# Altium PCB PCB_Nameless_3_2023-11-12.pcbdoc
Units mil, origin at the board's own origin, x right, y up, seen from the top; angles counter-clockwise.
Board outline 6527.04 x 4591.93 mil, 2 copper layers (Top Layer, Bottom Layer); 103 components, 96 nets, 388 pads, 63 vias.
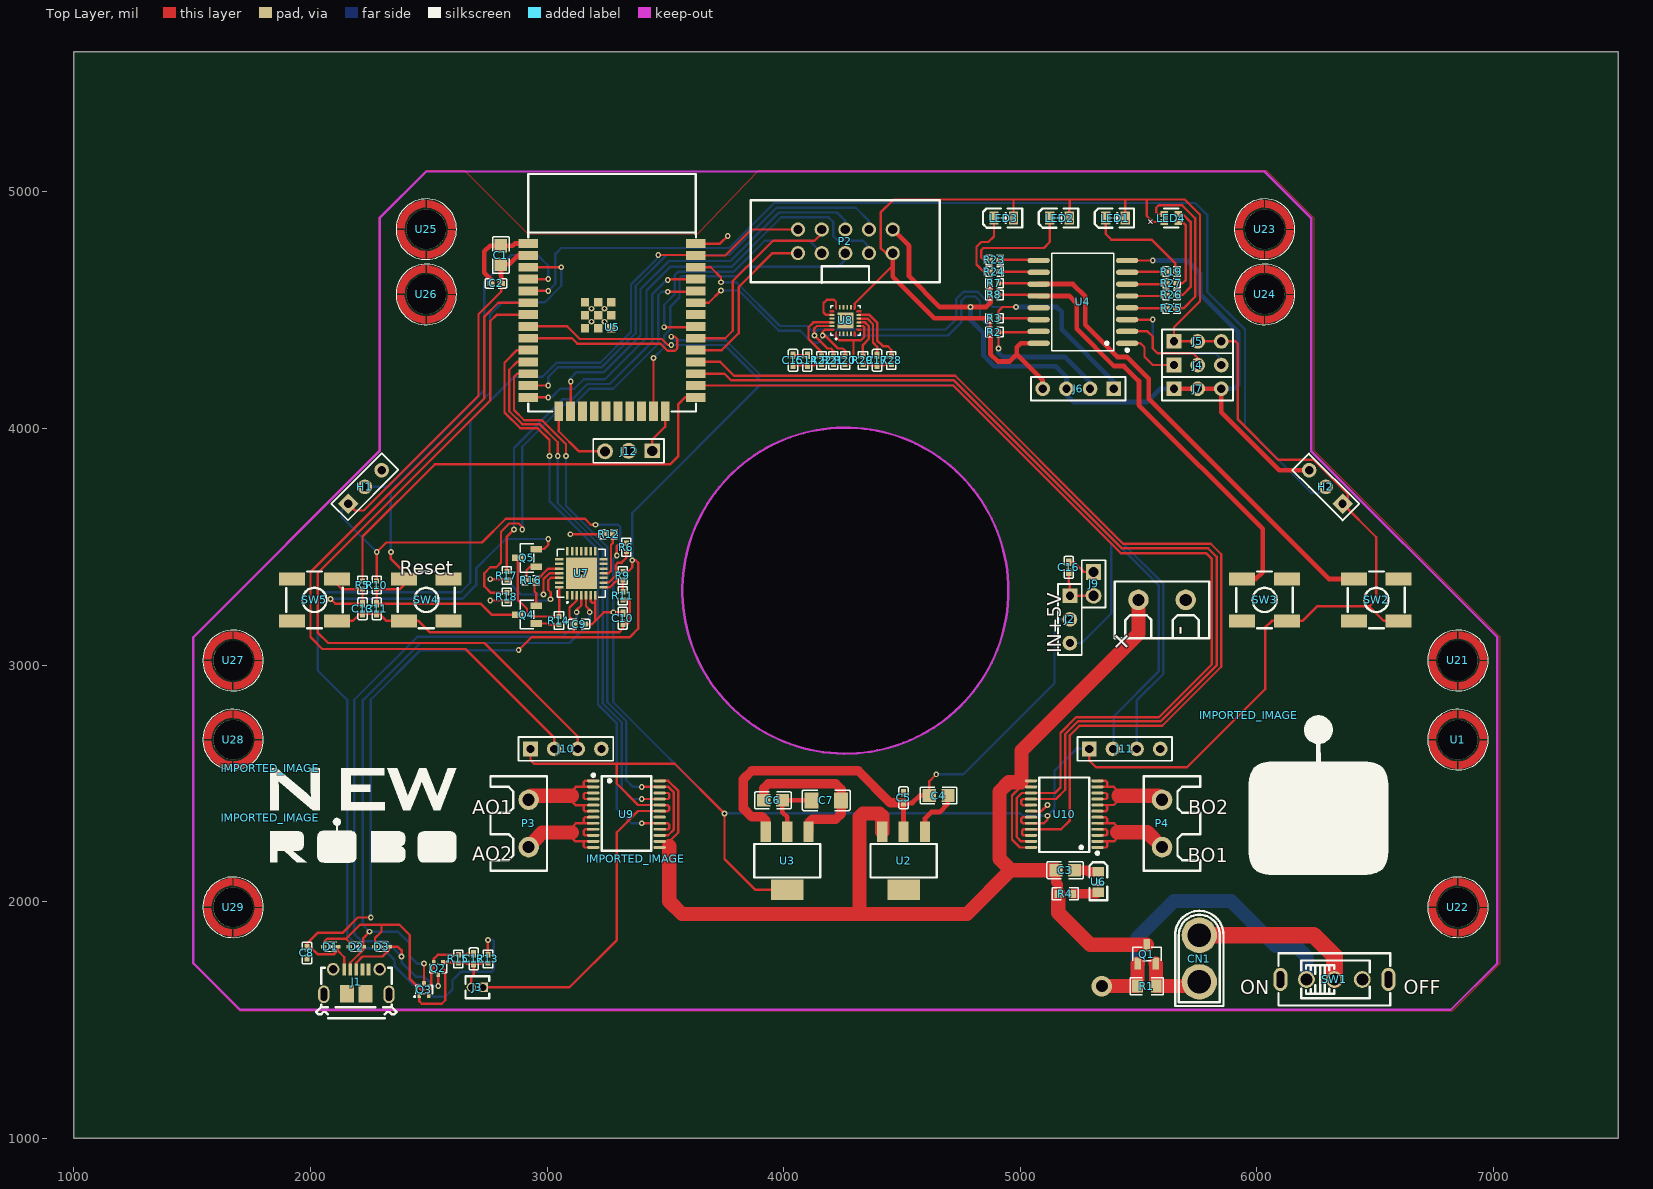
[diagram p0: Top Layer view]
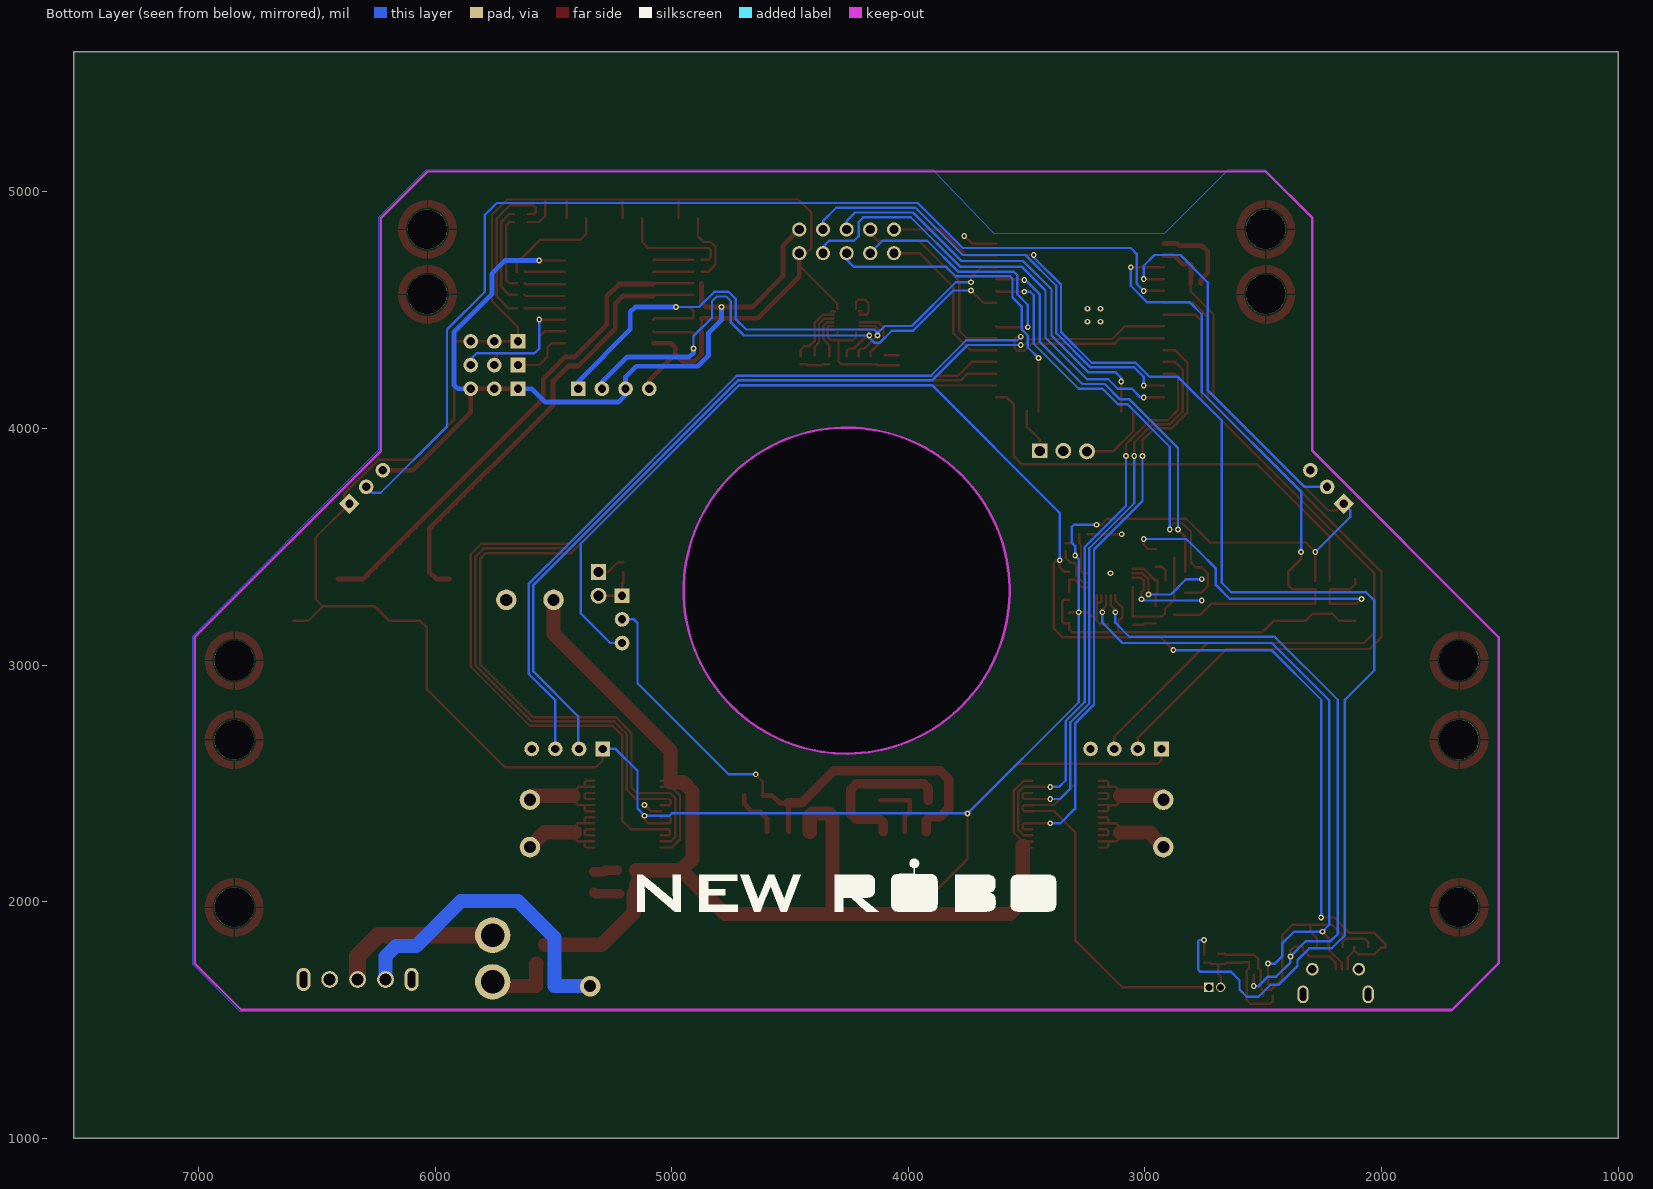
[diagram p1: Bottom Layer view, seen from below]

## Layer stack, top to bottom
Top Layer: signal copper (thickness not stored)
Dielectric: dielectric 12.6, FR-4, Dk 4.8
Bottom Layer: signal copper (thickness not stored)

## Board outline
7527.04,1000 1000,1000 1000,5591.93 7527.04,5591.93

## Components (designator, comment, footprint, x,y, rotation, side; value= is the part's Value field where it differs from the comment)
C1 "22uF" C0805 2805,4733.31 r90 top
C2 "100nF" C0402 2784.53,4613.31 r180 top
C3 "10uF" C0805 5189.99,2133.31 r0 top
C4 "22uF" C0805 4654.6,2448.82 r0 top
C5 "10uF" C0402 4506.96,2438.98 r90 top
C6 "22uF" C0805 3954.99,2428.31 r180 top
C7 "100uF" C1206 4179.99,2428.31 r0 top
C8 "100nF" C0402 1985,1783.31 r270 top
C9 "4.7uF" C0402 3135,3173.31 r0 top
C10 "100nF" C0402 3320,3198.31 r270 top
C11 "100nF" C0402 2280,3238.31 r270 top
C12 "100nF" C0402 2690,1758.31 r90 top
C13 "100nF" C0402 2220,3238.31 r270 top
C14 "100nF" C0402 4099.99,4288.31 r90 top
C15 "10nF" C0402 4039.99,4288.31 r90 top
C16 "100nF" C0402 5204.99,3413.31 r270 top
C17 "100nF" C0402 4394.99,4288.31 r270 top
CN1 "XT30U-M" CONN-TH_XT30U-M 5756.96,1759.85 r90 top
D1 "LESD5D5.0CT1G" SOD-523_L1.2-W0.8-LS1.6-BI 2085.71,1809.06 r180 top
D2 "LESD5D5.0CT1G" SOD-523_L1.2-W0.8-LS1.6-BI 2193.97,1809.06 r180 top
D3 "LESD5D5.0CT1G" SOD-523_L1.2-W0.8-LS1.6-BI 2302.24,1809.06 r180 top
H1 "HDR-F-2.54_1x3" HDR-F-2.54_1X3 2230,3753.31 r45 top
H2 "HDR-F-2.54_1x3" HDR-F-2.54_1X3 6291.8,3753.31 r135 top
IMPORTED_IMAGE "IMPORTED_IMAGE" IMPORTED_IMAGE 3375.08,2181.95 r0 top
IMPORTED_IMAGE "IMPORTED_IMAGE" IMPORTED_IMAGE 5964.99,2787.14 r0 top
IMPORTED_IMAGE "IMPORTED_IMAGE" IMPORTED_IMAGE 1829.02,2564.13 r0 top
IMPORTED_IMAGE "IMPORTED_IMAGE" IMPORTED_IMAGE 1829.02,2354.26 r0 top
J1 "105017-0001" MICRO-USB-SMD_105017-0001 2193.97,1661.42 r0 top
J2 "HDR-M-2.54_1x3" HDR-M-2.54_1X3 5209.99,3193.31 r270 top
J3 "DZ127R-11-02-25" HDR-TH_2P-P1.27-V-M 2705,1638.31 r180 top
J4 "HDR-M-2.54_1x3" HDR-M-2.54_1X3 5749.99,4268.31 r0 top
J5 "HDR-M-2.54_1x3" HDR-M-2.54_1X3 5749.99,4368.31 r0 top
J6 "HDR-M-2.54_1x4" HDR-M-2.54_1X4 5245.15,4168.31 r180 top
J7 "HDR-M-2.54_1x3" HDR-M-2.54_1X3 5749.99,4168.31 r0 top
J9 "HDR-M-2.54_1x2" HDR-M-2.54_1X2 5309.99,3343.31 r270 top
J10 "HDR-M-2.54_1x4" HDR-M-2.54_1X4 3079.8,2645.67 r0 top
J11 "HDR-M-2.54_1x4" HDR-M-2.54_1X4 5442,2645.67 r0 top
J12 "_" ?#1 3344.9,3953.21 r0 top
LED1 "SZYY0805B" LED0805-R-RD_BLUE 5402.63,4889.76 r0 top
LED2 "SZYY0805B" LED0805-R-RD_BLUE 5166.41,4889.76 r0 top
LED3 "SZYY0805B" LED0805-R-RD_BLUE 4930.19,4889.76 r0 top
LED4 "XL-1615RGBC-RF" LED-ARRAY-SMD_4P-L1.6-W1.5-BR_XL-1615RGBC-RF 5638.85,4889.76 r180 top
P2 "HDR-IDC-2.54-2X5P" IDC-TH_10P-P2.54_C5665 4260.9,4791.34 r0 top
P3 "" ?#2 2806.95,2378.41 r0 top
P4 "" ?#3 5719.44,2378.41 r0 top
Q1 "Si2323DDS-T1-GE3" SOT-23-3_L2.9-W1.3-P1.90-LS2.4-BR 5534.99,1778.31 r270 top
Q2 "2N7002T-7-F" SOT-523-3_L1.6-W0.8-P1.00-LS1.6-BR 2540.27,1717.77 r90 top
Q3 "2N7002T-7-F" SOT-523-3_L1.6-W0.8-P1.00-LS1.6-BR 2480,1628.31 r270 top
Q4 "SS8050-G_C164885" SOT-23-3_L2.9-W1.3-P1.90-LS2.4-BR 2915,3213.31 r0 top
Q5 "SS8050-G_C164885" SOT-23-3_L2.9-W1.3-P1.90-LS2.4-BR 2915,3453.31 r0 top
R1 "10kΩ" R0805 5534.99,1643.31 r0 top
R2 "1kΩ" R0402 4890.82,4407.48 r0 top
R3 "1kΩ" R0402 4890.82,4466.53 r0 top
R4 "2.2kΩ" R0603 5189.99,2033.31 r0 top
R5 "22Ω" R0402 2220,3338.31 r270 top
R6 "1kΩ" R0402 3335,3498.31 r270 top
R7 "10kΩ" R0402 4890.82,4614.17 r180 top
R8 "10kΩ" R0402 4890.82,4564.96 r180 top
R9 "22.1kΩ" R0402 3320,3378.31 r270 top
R10 "10kΩ" R0402 2280,3338.31 r270 top
R11 "47.5kΩ" R0402 3320,3293.31 r270 top
R12 "10kΩ" R0402 3260,3553.31 r180 top
R13 "1kΩ" R0402 2750,1758.31 r270 top
R14 "10kΩ" R0402 3050,3188.31 r270 top
R15 "10kΩ" R0402 2625,1758.31 r90 top
R16 "10kΩ" R0402 2930,3358.31 r180 top
R17 "0Ω" R0402 2830,3378.31 r270 top
R18 "0Ω" R0402 2830,3288.31 r270 top
R19 "1kΩ" R0402 5638.85,4663.38 r180 top
R20 "10kΩ" R0402 4259.99,4288.31 r90 top
R21 "10kΩ" R0402 4209.99,4288.31 r90 top
R22 "10kΩ" R0402 4159.99,4288.31 r90 top
R23 "1kΩ" R0402 4890.82,4712.6 r0 top
R24 "1kΩ" R0402 4890.82,4663.38 r0 top
R25 "1kΩ" R0402 5638.85,4507.87 r0 top
R26 "1kΩ" R0402 5638.85,4564.96 r180 top
R27 "1kΩ" R0402 5638.85,4614.17 r180 top
R28 "10kΩ" R0402 4454.99,4288.31 r270 top
R29 "10kΩ" R0402 4334.99,4288.31 r270 top
SW1 "SS-12F44-G5" SW-TH_SS-12F44-G5 6327.82,1671.26 r0 top
SW2 "PTS645SM43JSMTR92 LFS" KEY-SMD_4P-L6.0-W6.0-P4.50-LS6.6 6504.99,3275.59 r180 top
SW3 "PTS645SM43JSMTR92 LFS" KEY-SMD_4P-L6.0-W6.0-P4.50-LS6.6 6032.55,3275.59 r180 top
SW4 "PTS645SM43JSMTR92 LFS" KEY-SMD_4P-L6.0-W6.0-P4.50-LS6.6 2489.25,3275.59 r180 top
SW5 "PTS645SM43JSMTR92 LFS" KEY-SMD_4P-L6.0-W6.0-P4.50-LS6.6 2016.81,3275.59 r180 top
U1 "SMD_BD5.6-L5.6-W5.6-D4.1" SMD_BD5.6-L5.6-W5.6-D4.1 6849.48,2685.04 r0 top
U2 "AMS1117-5.0_C347223" SOT-223_L6.7-W3.5-P2.30-BR 4506.96,2173.23 r90 top
U3 "AMS1117-3.3_C347222" SOT-223_L6.7-W3.5-P2.30-BR 4014.84,2173.23 r90 top
U4 "PCF8574T/3,518" SOIC-16_L10.3-W7.5-P1.27-LS10.3-BL 5264.84,4535.43 r90 top
U5 "ESP32-WROOM-32E(4MB)" WIFI-SMD_ESP32-WROOM-32E 3274.68,4427.16 r270 top
U6 "LSR976-NR-1" LED0805-RD_RED 5329.99,2083.31 r270 top
U7 "CP2102N-A02-GQFN28R" QFN-28_L5.0-W5.0-P0.50-TL-EP3.3 3145,3388.31 r90 top
U8 "MPU-9250" QFN-24_L3.0-W3.0-P0.40-BL-EP 4260.9,4456.69 r0 top
U9 "TB6612FNG,C,8,EL" SSOP-24_L8.3-W5.6-P0.65-LS7.6-BL 3335.7,2370.08 r270 top
U10 "TB6612FNG,C,8,EL" SSOP-24_L8.3-W5.6-P0.65-LS7.6-BL 5186.1,2370.08 r90 top
U21 "SMD_BD5.6-L5.6-W5.6-D4.1" SMD_BD5.6-L5.6-W5.6-D4.1 6849.48,3019.69 r0 top
U22 "SMD_BD5.6-L5.6-W5.6-D4.1" SMD_BD5.6-L5.6-W5.6-D4.1 6849.48,1976.38 r0 top
U23 "SMD_BD5.6-L5.6-W5.6-D4.1" SMD_BD5.6-L5.6-W5.6-D4.1 6032.55,4842.52 r0 top
U24 "SMD_BD5.6-L5.6-W5.6-D4.1" SMD_BD5.6-L5.6-W5.6-D4.1 6032.55,4566.93 r0 top
U25 "SMD_BD5.6-L5.6-W5.6-D4.1" SMD_BD5.6-L5.6-W5.6-D4.1 2489.25,4842.52 r0 top
U26 "SMD_BD5.6-L5.6-W5.6-D4.1" SMD_BD5.6-L5.6-W5.6-D4.1 2489.25,4566.93 r0 top
U27 "SMD_BD5.6-L5.6-W5.6-D4.1" SMD_BD5.6-L5.6-W5.6-D4.1 1672.32,3019.69 r0 top
U28 "SMD_BD5.6-L5.6-W5.6-D4.1" SMD_BD5.6-L5.6-W5.6-D4.1 1672.32,2685.04 r0 top
U29 "SMD_BD5.6-L5.6-W5.6-D4.1" SMD_BD5.6-L5.6-W5.6-D4.1 1672.32,1976.38 r0 top

## Footprints (in the part's own frame and the unit in brackets; to place one, negate y for a bottom-side part, rotate by r counter-clockwise, add the part's x,y. Pads: shape width x height; smd on the part's side, far side on the other; paste and mask are expansions set on the pad)
C0402 [mm]
  rect 0.79x0.54 smd paste-100 mask+0.051: 1(-0.545,0) 2(0.545,0)
  silkscreen extent -1.17,-0.5 1.17,0.5
C0805 [mm]
  rect 1.41x1.35 smd paste-100 mask+0.051: 1(-1,0) 2(1,0)
  silkscreen extent -1.96,-0.9 1.96,0.9
C1206 [mm]
  rect 1.485x1.728 smd paste-100 mask+0.051: 1(-1.593,0) 2(1.593,0)
  silkscreen extent -2.56,-1.09 2.56,1.09
CONN-TH_XT30U-M [mm]
  round 3.8 hole 2.54 paste+0 mask+0.05: 1(-2.5,0) 2(2.5,0)
  silkscreen extent -5.1,-2.6 5.11,2.6
HDR-F-2.54_1X3 [mil]
  rect 62x62 hole 35 paste+0 mask+2: 1(-100,0)
  round 62 hole 35 paste+0 mask+2: 2(0,0)
  round 62 hole 36 paste+0 mask+2: 3(100,0)
  silkscreen extent -150,-49 150,50
HDR-M-2.54_1X2 [mm]
  rect 1.7x1.575 hole 1.1 paste+0 mask+0.051: 1(-1.27,0)
  round 1.7 hole 1.1 paste+0 mask+0.051: 2(1.27,0)
  silkscreen extent -2.54,-1.27 2.54,1.27
HDR-M-2.54_1X3 [mil]
  rect 62x62 hole 35 paste+0 mask+2: 1(-100,0)
  round 62 hole 35 paste+0 mask+2: 2(0,0) 3(100,0)
  silkscreen extent -150,-50 150,50
HDR-M-2.54_1X4 [mil]
  rect 62x62 hole 35 paste+0 mask+2: 1(-150,0)
  round 62 hole 35 paste+0 mask+2: 2(-50,0) 3(50,0) 4(150,0)
  silkscreen extent -200,-50 200,50
HDR-TH_2P-P1.27-V-M [mm]
  rect 1x1 hole 0.75 paste+0 mask+0.051: 1(-0.635,0)
  round 1 hole 0.75 paste+0 mask+0.051: 2(0.635,0)
  silkscreen extent -1.27,-1.18 1.27,1.18
IDC-TH_10P-P2.54_C5665 [mil]
  round 60 hole 39.37 paste+0 mask+1.97: 1(-200,-50) 2(-200,50) 3(-100,-50) 4(-100,50) 5(0,-50) 6(0,50) 7(100,-50) 8(100,50) 9(200,-50) 10(200,50)
  silkscreen extent -400,-175 400,173
IMPORTED_IMAGE [mil]
KEY-SMD_4P-L6.0-W6.0-P4.50-LS6.6 [mm]
  rect 2.8x1.4 smd paste+0 mask+0.051: 1(-2.4,-2.25) 2(2.4,-2.25) 3(2.4,2.25) 4(-2.4,2.25)
  silkscreen extent -3.05,-3.05 3.05,3.05
LED0805-R-RD_BLUE [mm]
  rect 1x1.4 smd paste+0 mask+0.051: 1(1.05,0) 2(-1.05,0)
  silkscreen extent -2.22,-1.04 1.99,1.01
LED0805-RD_RED [mm]
  rect 1x1.25 smd paste+0 mask+0.051: 1(-1.1,0) 2(1.1,0)
  silkscreen extent -2.1,-0.95 1.98,0.96
LED-ARRAY-SMD_4P-L1.6-W1.5-BR_XL-1615RGBC-RF [mm]
  rect 0.8x0.65 smd paste+0 mask+0.05: 1(0.75,-0.425) 2(0.75,0.425) 3(-0.75,0.425) 4(-0.75,-0.425)
  silkscreen extent -0.76,-1.02 0.76,1.02
MICRO-USB-SMD_105017-0001 [mm]
  rect 0.4x1.3 smd paste-100 mask+0.051: 1(-1.3,1.33) 2(-0.65,1.33) 3(0,1.33) 4(0.65,1.33) 5(1.3,1.33)
  round 1.35 hole 0.9 paste+0 mask+0.051: 6(-2.5,1.35) 7(2.5,1.35)
  oval 1.2x1.9 hole 0.7 slot 1.4 at 90 deg paste+0 mask+0.051: 8(3.5,-1.35) 9(-3.5,-1.35)
  rect 1.5x1.9 smd paste-100 mask+0.051: 10(-1,-1.28) 10(1,-1.28)
  silkscreen extent -4.32,-3.9 4.32,1.5
QFN-24_L3.0-W3.0-P0.40-BL-EP [mm]
  rect 0.2x0.505 smd paste-100 mask+0.051: 2(-0.6,-1.428) 3(-0.2,-1.428) 4(0.2,-1.428) 5(0.6,-1.428) 14(0.6,1.428) 15(0.2,1.428) 16(-0.2,1.428) 17(-0.6,1.428)
  rect 0.505x0.2 smd paste-100 mask+0.051: 8(1.428,-0.6) 9(1.428,-0.2) 10(1.428,0.2) 11(1.428,0.6) 20(-1.428,0.6) 21(-1.428,0.2) 22(-1.428,-0.2) 23(-1.428,-0.6)
  rect 1.7x1.7 smd paste-100 mask+0.051: 25(0,0)
  Top Layer region: -1.1,1.68 -0.9,1.68 -0.9,1.175 -1,1.174 -1.1,1.274
  Top Layer region: -1.68,-1.1 -1.274,-1.1 -1.174,-1 -1.175,-0.9 -1.68,-0.9
  Top Layer region: 1.68,-1.1 1.275,-1.1 1.175,-1 1.175,-0.9 1.68,-0.9
  Top Layer region: 1.68,1.1 1.274,1.1 1.174,1 1.175,0.9 1.68,0.9
  Top Layer region: 1.1,1.68 0.9,1.68 0.9,1.175 1,1.174 1.1,1.274
  Top Layer region: -1.1,-1.68 -0.9,-1.68 -0.9,-1.175 -1,-1.175 -1.1,-1.275
  Top Layer region: 1.1,-1.68 0.9,-1.68 0.9,-1.175 1,-1.175 1.1,-1.275
  Top Layer region: -1.68,1.1 -1.274,1.1 -1.174,1 -1.175,0.9 -1.68,0.9
  silkscreen extent -1.58,-2.05 1.58,1.58
QFN-28_L5.0-W5.0-P0.50-TL-EP3.3 [mm]
  rect 0.905x0.28 smd paste-100 mask+0.051: 1(-2.377,1.5) 2(-2.377,1) 3(-2.377,0.5) 4(-2.377,0) 5(-2.377,-0.5) 6(-2.377,-1) 7(-2.377,-1.5) 15(2.377,-1.5) 16(2.377,-1) 17(2.377,-0.5) 18(2.377,0) 19(2.377,0.5) 20(2.377,1) 21(2.377,1.5)
  rect 0.28x0.905 smd paste-100 mask+0.051: 8(-1.5,-2.377) 9(-1,-2.377) 10(-0.5,-2.377) 11(0,-2.377) 12(0.5,-2.377) 13(1,-2.377) 14(1.5,-2.377) 22(1.5,2.377) 23(1,2.377) 24(0.5,2.377) 25(0,2.377) 26(-0.5,2.377) 27(-1,2.377) 28(-1.5,2.377)
  rect 3.35x3.35 smd paste-100 mask+0.051: 29(0,0)
  silkscreen extent -3.2,-2.58 2.58,2.58
R0402 [mm]
  rect 0.566x0.54 smd paste-100 mask+0.051: 1(-0.433,0) 2(0.433,0)
  silkscreen extent -0.94,-0.5 0.94,0.5
R0603 [mil]
  rect 31.75x34.02 smd paste-3937.01 mask+2: 1(-29.66,0) 2(29.65,0)
  silkscreen extent -55,-26 55,26
R0805 [mil]
  rect 44.59x54.21 smd paste-3937.01 mask+2: 1(-39.37,0) 2(39.37,0)
  silkscreen extent -69,-36 69,36
SMD_BD5.6-L5.6-W5.6-D4.1 [mil]
  round 167.32 hole 167.32 unplated paste+0: ""(0.39,-0.1)
  Top Layer region: 4.06,122.59 9.97,122.2 19.02,121.01 24.93,119.83 37.53,116.29 53.67,109.99 69.02,101.33 82.41,90.31 96.58,76.13 107.21,59.6 111.54,50.94 116.27,39.91 122.17,18.26 123.75,2.91 92.25,2.91 90.28,15.9 85.16,34.8 79.65,43.46 70.99,56.84 58.39,70.23 41.86,80.46 31.62,85.19 15.87,89.91 4.06,91.09
  Top Layer region: 123.49,-4.25 123.09,-10.16 121.91,-19.21 120.73,-25.12 117.19,-37.72 110.89,-53.86 102.23,-69.21 91.2,-82.6 77.03,-96.77 60.49,-107.4 51.83,-111.73 40.81,-116.46 19.16,-122.36 3.8,-123.94 3.8,-92.44 16.79,-90.47 35.69,-85.36 44.35,-79.84 57.74,-71.18 71.12,-58.58 81.36,-42.05 86.09,-31.81 90.81,-16.07 91.99,-4.25
  Top Layer region: -4.06,-123.59 -9.96,-123.2 -19.02,-122.02 -24.93,-120.84 -37.52,-117.29 -53.66,-110.99 -69.02,-102.33 -82.4,-91.31 -96.58,-77.13 -107.21,-60.6 -111.54,-51.94 -116.26,-40.91 -122.17,-19.26 -123.74,-3.91 -92.25,-3.91 -90.28,-16.9 -85.16,-35.8 -79.65,-44.46 -70.99,-57.84 -58.39,-71.23 -41.85,-81.46 -31.62,-86.19 -15.87,-90.91 -4.06,-92.09
  Top Layer region: -123.2,4.25 -122.8,10.16 -121.62,19.21 -120.44,25.12 -116.9,37.72 -110.6,53.86 -101.94,69.21 -90.91,82.6 -76.74,96.77 -60.2,107.4 -51.54,111.73 -40.52,116.46 -18.87,122.36 -3.51,123.94 -3.51,92.44 -16.5,90.47 -35.4,85.36 -44.06,79.84 -57.45,71.18 -70.83,58.58 -81.07,42.05 -85.8,31.81 -90.52,16.07 -91.7,4.25
  silkscreen extent -127,-128 128,128
SOD-523_L1.2-W0.8-LS1.6-BI [mm]
  rect 0.6x0.4 smd paste+0 mask+0.051: 1(-0.75,0) 2(0.75,0)
  silkscreen extent -0.65,-0.5 0.65,0.5
SOIC-16_L10.3-W7.5-P1.27-LS10.3-BL [mil]
  oval 22.6x94.51 smd paste+0 mask+2: 1(-175,-187.02) 2(-125,-187.02) 3(-75,-187.02) 4(-25,-187.02) 5(25,-187.02) 6(75,-187.02) 7(125,-187.02) 8(175,-187.02) 9(175,187.02) 10(125,187.02) 11(75,187.02) 12(25,187.02) 13(-25,187.02) 14(-75,187.02) 15(-125,187.02) 16(-175,187.02)
  silkscreen extent -210,-193 206,131
SOT-23-3_L2.9-W1.3-P1.90-LS2.4-BR [mm]
  rect 1.25x0.7 smd paste+0 mask+0.051: 1(1,-0.95) 2(1,0.95) 3(-1,0)
  silkscreen extent -0.73,-1.53 0.73,1.53
SOT-223_L6.7-W3.5-P2.30-BR [mm]
  rect 2.2x1.1 smd paste+0 mask+0.051: 1(3.099,-2.3) 2(3.099,0) 3(3.099,2.3)
  rect 2.2x3.5 smd paste+0 mask+0.051: 4(-3.099,0)
  silkscreen extent -1.8,-3.55 1.8,3.55
SOT-523-3_L1.6-W0.8-P1.00-LS1.6-BR [mm]
  rect 0.51x0.4 smd paste+0 mask+0.051: 1(0.65,-0.5) 2(0.65,0.5) 3(-0.65,0)
  silkscreen extent -0.45,-1.08 0.83,0.9
SSOP-24_L8.3-W5.6-P0.65-LS7.6-BL [mm]
  oval 0.308x1.324 smd paste+0 mask+0.051: 1(-3.575,-3.562) 2(-2.925,-3.562) 3(-2.275,-3.562) 4(-1.625,-3.562) 5(-0.975,-3.562) 6(-0.325,-3.562) 7(0.325,-3.562) 8(0.975,-3.562) 9(1.625,-3.562) 10(2.275,-3.562) 11(2.925,-3.562) 12(3.575,-3.562) 13(3.575,3.562) 14(2.925,3.562) 15(2.275,3.562) 16(1.625,3.562) 17(0.975,3.562) 18(0.325,3.562) 19(-0.325,3.562) 20(-0.975,3.562) 21(-1.625,3.562) 22(-2.275,3.562) 23(-2.925,3.562) 24(-3.575,3.562)
  silkscreen extent -4.33,-3.71 3.94,2.67
SW-TH_SS-12F44-G5 [mm]
  round 1.8 hole 1.3 paste+0 mask+0.051: 1(-3,0) 2(0,0) 3(3,0)
  oval 1.5x2.5 hole 0.8 slot 1.8 at 90 deg paste+0 mask+0.051: 4(5.8,0) 5(-5.8,0)
  silkscreen extent -6,-2.8 6,2.8
WIFI-SMD_ESP32-WROOM-32E [mm]
  rect 0.95x2.1 smd paste+0 mask+0.051: 1(-9.002,-9) 2(-7.732,-9) 3(-6.462,-9) 4(-5.192,-9) 5(-3.922,-9) 6(-2.652,-9) 7(-1.382,-9) 8(-0.112,-9) 9(1.158,-9) 10(2.428,-9) 11(3.698,-9) 12(4.968,-9) 13(6.238,-9) 14(7.508,-9) 25(7.507,9) 26(6.237,9) 27(4.967,9) 28(3.697,9) 29(2.427,9) 30(1.157,9) 31(-0.113,9) 32(-1.383,9) 33(-2.653,9) 34(-3.923,9) 35(-5.193,9) 36(-6.463,9) 37(-7.733,9) 38(-9.003,9)
  rect 2.1x0.95 smd paste+0 mask+0.051: 15(9.002,-5.715) 16(9.002,-4.445) 17(9.002,-3.175) 18(9.002,-1.905) 19(9.002,-0.635) 20(9.002,0.635) 21(9.002,1.905) 22(9.002,3.175) 23(9.002,4.445) 24(9.002,5.715)
  rect 0.9x0.9 smd paste+0 mask+0.051: 39(-2.721,-0.1) 39(-2.721,-2.9) 39(-2.721,-1.5) 39(-1.322,-0.1) 39(-1.322,-2.9) 39(-1.321,-1.5) 39(0.078,-0.1) 39(0.078,-1.5) 39(0.078,-2.9)
  silkscreen extent -16.48,-9 9.02,9.02
?#1 [mm]
  rect 1.7x1.575 hole 1.1 paste+0 mask+0.051: 1(2.536,-1.212)
  round 1.7 hole 1.1 paste+0 mask+0.051: 2(-2.538,-1.267) 2(-0.004,-1.212)
  silkscreen extent -3.81,-2.48 3.81,0.06
?#2 [mm]
  round 2.2 hole 1.3 paste+0 mask+0.051: 1(2.93,1.328) 2(2.93,-3.752)
  silkscreen extent -1.17,-6.29 4.9,3.87
?#3 [mm]
  round 2.2 hole 1.3 paste+0 mask+0.051: 1(-3.047,-3.752) 2(-3.047,1.328)
  silkscreen extent -5.02,-6.29 1.05,3.87

## Free pads (board coordinates)
  round 86.61 hole 51.18 paste+0 mask+2: 1(5499.48,3275.59) 2(5699.48,3275.59)
  round 1377.95 hole 1377.95 unplated paste+0: ""(4260.9,3314.96)

## Via types
v1: diameter 24.41, hole 12.2, Top Layer to Bottom Layer, tented both sides, 62 vias
v2: diameter 86.61, hole 51.18, Top Layer to Bottom Layer, tented both sides, 1 vias

## Nets (pads, with @x,y where several pads share a name; then routed paths per layer and width w, separated by ;. In a path a pad name is that pad's centre, name@x,y a point inside that pad or via, vN(x,y) a via of type N, cw(c..) or ccw(c..) an arc to the next point about the centre after c; other vN are vias at no path point)
+3V3: C1.1 C2.1 C6.1 C7.1 C9.2 C10.1 C14.1 C15.1 H1.1 H2.1 J3.1 J5.1 J5.2 J5.3 J6.4 J10.1 J11.1 LED1.1 LED2.1 LED3.1 LED4.2 P2.9 R2.1 R3.1 R6.1 R10.1 R20.1 R21.1 R22.1 SW2.4 SW3.4 U3.2 U3.4 U4.16 U5.2 U7.6 U7.7 U8.8 U9.19 U9.20 U10.19 U10.20 | length 18455.2
  Top Layer w10: H1.1 2188.6,3653.31 2225,3653.31 2710,4138.31 2710,4483.31 2806,4579.31 C2.1 ; R10.1 v1(2280,3478.31) 2319.99,3518.31 2724.99,3518.31 2824.99,3618.31 3160,3618.31 3184.99,3593.31 v1(3205,3593.31) ; J3.1 3095,1638.31 3295,1838.31 3295,2293.31 3385,2383.31 U9.19@3476,2382.91 ; J10.1 2929.8,2598.51 2945,2583.31 3295,2583.31 ; C9.2 3190,3173.31 3204.1,3187.41 3204.1,3267.41 ; U7.6 3184.4,3268.91 3190,3263.31 3200,3263.31 3204.1,3267.41 ; 3204.06,3187.37 3240,3223.31 v1(3280,3223.31) 3316.5,3223.31 C10.1 ; U7.7 3204.1,3267.41 ; v1(3295,3463.31) 3295,3503.31 3307,3515.31 R6.1 ; U9.19@3475,2382.61 3510.8,2382.61 3515.8,2387.61 3515.8,2402.61 3510.1,2408.31 U9.20@3475,2408.31 ; U9.20@3476,2408.51 3384.8,2408.51 3295,2498.31 3295,2583.31 ; U3.4 3878.7,2051.21 3750,2179.91 v1(3750,2373.31) 3540,2583.31 3295,2583.31 ; C15.1 C14.1 4128.5,4266.81 4132.9,4271.21 4160,4271.21 4210,4271.21 4260,4271.21 4282.9,4271.21 4295,4283.31 4295,4373.31 ; 4221.5,4400.51 4221.5,4386.71 4235,4373.31 4326.7,4373.31 4340.8,4387.41 4340.8,4427.51 4335.2,4433.11 U8.8 ; 4300.3,4512.91 4300.3,4528.61 4460.9,4689.21 P2.9 4432,4741.31 4410,4763.31 4410,4913.31 4465,4968.31 4971.5,4968.31 ; R2.1 R3.1 ; LED3.1 4971.5,4968.31 ; U10.20@5045.8,2331.61 5010,2331.61 5005,2336.61 5005,2351.61 5010.8,2357.31 U10.19@5045.8,2357.31 ; U10.20@5045.8,2331.71 5100,2331.71 5115,2346.71 v1(5114.99,2363.31) ; LED2.1 5208.8,4968.31 ; J11.1 5292,2596.31 5320,2568.31 5705,2568.31 6035,2898.31 6035,3158.31 6063.7,3187.01 SW3.4 6193.7,3187.01 6255,3248.31 6475,3248.31 ; LED1.1 5444,4968.31 ; LED4.2 5560.3,4873.01 5535,4898.31 5535,4968.31 ; SW2.4 6536.3,3187.01 6475,3248.31 ; 4971.5,4968.31 5535,4968.31 ; 5535,4968.31 5695,4968.31 5760,4903.31 5760,4538.31 5650,4428.31 J5.1 J5.2 J5.3 5910,4368.31 5920,4358.31 5920,4038.31 6090,3868.31 6240,3868.31 6385,3723.31 6385,3705.11 H2.1 6505,3540.11 6505,3278.31 6475,3248.31
  Top Layer w20: C2.1@2806.5,4613.31 2806.5,4648.31 2805,4648.31 C1.1 2840.6,4693.91 2878.3,4731.61 U5.2@2920.4,4731.61 ; U3.2 4014.8,2358.51 3994.4,2378.91 C6.1 4063.4,2428.31 C7.1 ; P2.9 4460.9,4642.41 4636.8,4466.51 R3.1 ; R2.1 4873.8,4314.51 4905,4283.31 4955,4283.31 4985,4313.31 ; U4.16 5002.1,4360.41 4985,4343.31 4985,4313.31 ; J6.4 5095.2,4203.11 4985,4313.31
  Bottom Layer w10: H1.1 2132.2,3655.51 2132.2,3626.11 v1(2280,3478.31) ; v1(3205,3593.31) 3300,3593.31 3310,3583.31 3310,3518.31 3295,3503.31 v1(3295,3463.31) 3280,3448.31 v1(3280,3223.31) 3279.99,2843.31 v1(3750,2373.31) 5000,2373.31 5010,2363.31 v1(5114.99,2363.31) 5145,2393.31 5145,2553.31 5237.4,2645.71 J11.1
+5V: C4.1 C5.1 J2.2 U2.2 U2.4 U3.3 | length 2367.3
  Top Layer w10: C4.1 4615.2,2508.51 v1(4644.99,2538.31)
  Top Layer w20: U2.2 C5.1 4544.2,2417.51 4575.5,2448.81 C4.1
  Top Layer w40: U3.3 3924.3,2344.01 3910,2358.31 3865,2358.31 3830,2393.31 3830,2518.31 3865,2553.31 4315,2553.31 4450.8,2417.51 C5.1
  Bottom Layer w10: v1(4644.99,2538.31) 4760,2538.31 5145,2923.31 5145,3178.31 5160,3193.31 J2.2
+5V_EXT: C16.2 J2.1 J9.2 | length 200.6
  Top Layer w10: C16.2 5205,3348.31 5210,3343.31 J2.1 J9.2
+5V_VBUS: C8.1 D1.1 J1.1 J2.3 R9.1 | length 6413.1
  Top Layer w10: J1.1 2142.8,1765.51 2115.2,1793.11 2115.2,1809.01 2115.2,1793.51 2100,1778.31 2030,1778.31 2003.5,1804.81 C8.1 1985,1823.31 2030,1868.31 2135,1868.31 2200,1933.31 v1(2255,1933.31) ; v1(2880,3063.31) 2935,3118.31 3350,3118.31 3385,3153.31 3385,3433.31 3375,3443.31 v1(3360,3443.31) 3360,3412.31 3343,3395.31 R9.1
  Bottom Layer w10: v1(2255,1933.31) 2255,2853.31 2465,3063.31 v1(2880,3063.31) ; v1(3360,3443.31) 3360,3643.31 3900,4183.31 4715,4183.31 5385,3513.31 5385,3218.31 5260,3093.31 J2.3
AO1: P3.1 U9.1 U9.2 U9.5 U9.6 | length 561.7
  Top Layer w10: 3160.4,2408.31 3120,2408.31 3105,2423.31 3105,2468.31 3121.8,2485.11 3159.7,2485.11 ; U9.6@3195.5,2382.81 3159.7,2382.81 3154.7,2387.81 3154.7,2402.81 3160.4,2408.51 U9.5 ; U9.2@3195.5,2485.11 3159.7,2485.11 ; U9.1 3160.4,2510.81 3154.7,2505.11 3154.7,2490.11 3159.7,2485.11
  Top Layer w60: P3.1 2934.29,2447.6 3029.29,2447.6 3105,2447.6
AO2: P3.2 U9.7 U9.8 U9.11 U9.12 | length 580.3
  Top Layer w10: 3159.67,2331.58 3121.77,2331.58 3104.97,2314.78 3104.97,2269.78 3119.97,2254.78 3160.37,2254.78 ; U9.12@3195.5,2229.21 3159.7,2229.21 3154.7,2234.21 3154.7,2249.21 3160.4,2254.91 U9.11 ; U9.8@3195.5,2331.61 3159.7,2331.61 3154.7,2336.61 3154.7,2351.61 3160.4,2357.31 U9.7
  Top Layer w60: P3.2 2979.6,2292.91 3105,2292.91
BO1: P4.1 U10.1 U10.2 U10.5 U10.6 | length 575
  Top Layer w10: U10.1@5326.3,2229.21 5362.1,2229.21 5367.1,2234.21 5367.1,2249.21 5361.4,2254.91 ; U10.2 5361.4,2254.91 ; U10.5@5326.3,2331.61 5362.1,2331.61 ; U10.6 5361.4,2357.31 5367.1,2351.61 5367.1,2336.61 5362.1,2331.61 ; 5361.4,2254.91 5396.6,2254.91 5410,2268.31 5410,2318.31 5396.7,2331.61 5362.1,2331.61
  Top Layer w60: 5410,2293.34 5536.85,2293.34 P4.1
BO2: P4.2 U10.7 U10.8 U10.11 U10.12 | length 549.3
  Top Layer w10: U10.7@5326.3,2382.81 5362.1,2382.81 5367.1,2387.81 5367.1,2402.81 5361.4,2408.51 ; U10.8 5361.4,2408.51 ; U10.11@5326.3,2485.11 5362.1,2485.11 ; U10.12 5361.4,2510.81 5367.1,2505.11 5367.1,2490.11 5362.1,2485.11 ; 5361.4,2408.51 5395.2,2408.51 5410,2423.31 5410,2470.11 5395,2485.11 5362.1,2485.11
  Top Layer w60: 5415,2448 5582.19,2448 P4.2
DTR: Q5.3 R14.1 U7.28 | length 516.2
  Top Layer w10: Q5.3 2875.6,3277.71 2915,3238.31 2915,3218.31 2928,3205.31 R14.1 3051.4,3206.71 U7.28@3051.4,3329.21
EN: C11.1 Q4.3 R10.2 SW4.1 SW4.2 U5.3 | length 2707.6
  Top Layer w10: v1(2340,3478.31) 2340,3448.31 2394.8,3393.51 SW4.2 2394.8,3338.11 2378,3321.31 R10.2 C11.1 2718.5,3259.81 2765,3213.31 Q4.3 ; U5.3@2920.4,4681.61 v1(3060,4681.59)
  Bottom Layer w10: v1(2340,3478.31) 2340,3733.31 2760,4153.31 2760,4483.31 2810,4533.31 2990,4533.31 3060,4603.31 v1(3060,4681.59)
GND: C1.2 C2.2 C3.2 C4.2 C5.2 C6.2 C7.2 C8.2 C9.1 C10.2 C11.2 C12.2 C13.2 C14.2 C15.2 C16.1 C17.2 CN1.2 D1.2 D2.2 D3.2 H1.3 H2.3 J1.5 J1.6 J1.7 J1.8 J1.9 J1.10 J6.3 J7.1 J7.2 J7.3 J9.1 J10.4 J11.4 J12.2@3245,3903.32 P2.10 pad.2 Q2.2 Q3.2 R7.2 R8.2 R11.2 R12.2 R15.2 R28.2 R29.2 SW1.2 SW4.3 SW4.4 SW5.3 SW5.4 U2.1 U3.1 U4.8 U5.1 U5.15 U5.38 U5.39 U6.1 U7.3 U7.29 U8.20 U9.3 U9.4 U9.9 U9.10 U9.18 U10.3 U10.4 U10.9 U10.10 U10.18 | length 10055.3
  Top Layer w10: D1.2@2056.2,1809.01 2056.2,1829.51 2070,1843.31 2150,1843.31 ; SW5.4 2178.7,3187.01 2208.5,3216.81 C13.2 C11.2 2291.5,3216.81 2321.3,3187.01 SW4.3 2456.3,3187.01 2505,3138.31 3113.5,3138.31 ; D2.2@2164.5,1809.01 2164.5,1828.81 2150,1843.31 ; D3.2@2272.7,1809.01 2272.7,1846.01 2300,1873.31 2300,1903.31 ; Q3.2 2499.7,1623.01 2510,1633.31 2510,1708.31 2520.6,1718.91 2520.6,1743.31 2520.6,1757.91 2538,1775.31 2625,1775.31 2657,1775.31 2661.5,1779.81 C12.2 ; 2499.7,1619.71 2491.1,1628.31 2465,1628.31 2420,1673.31 2420,1858.31 2375,1903.31 2210,1903.31 2150,1843.31 ; U5.15 3049.7,3988.61 3135,3903.31 J12.2@3245,3903.31 ; v1(3098.3,3553.31) R12.2 ; U7.3 3125.3,3273.61 3095,3243.31 3095,3203.31 3113.5,3184.81 C9.1 3113.5,3138.31 ; U9.10@3195.5,2280.41 3159.7,2280.41 3154.7,2285.41 3154.7,2300.41 3160.4,2306.11 U9.9 ; U9.4@3195.5,2433.91 3159.7,2433.91 3154.7,2438.91 3154.7,2453.91 3160.4,2459.61 U9.3 ; R11.2 3342,3276.31 3350,3268.31 3350,3183.31 3343.5,3176.81 C10.2 3320,3153.31 3305,3138.31 3113.5,3138.31 ; U5.38 3731.08,4781.59 v1(3763.66,4814.17) ; C15.2 C14.2 ; 4168.4,4490.91 4168.4,4530.31 4182.6,4544.51 4212.9,4544.51 4221.5,4535.81 4221.5,4512.91 ; 4168.39,4490.93 4179.01,4480.31 U8.20 ; R29.2@4335,4271.21 4362,4271.21 4366.5,4266.81 C17.2 4423.5,4266.81 4427.9,4271.21 R28.2@4455,4271.21 ; U10.18@5045.8,2382.91 5089.6,2382.91 v1(5114.99,2408.31) ; C16.1@5205,3434.71 5228.6,3434.71 5270,3393.31 J9.1 ; U10.3@5326.3,2280.41 5362.1,2280.41 5367.1,2285.41 5367.1,2300.41 5361.4,2306.11 U10.4 ; U10.9@5326.3,2433.91 5362.1,2433.91 5367.1,2438.91 5367.1,2453.91 5361.4,2459.61 U10.10 ; U4.8 v1(5559.99,4710.43)
  Top Layer w20: C2.2@2763.5,4613.31 2763.5,4629.81 2735,4658.31 2735,4748.31 2759.4,4772.71 C1.2 2854.4,4772.71 2863.3,4781.61 U5.1@2920.4,4781.61 ; P2.10 4529.99,4772.24 4529.99,4643.31 4659.99,4513.31 v1(4789.99,4513.3) 4855,4513.31 4873.8,4532.11 R8.2 R7.2 ; U2.1 4597.5,2352.01 4624.7,2379.11 4659.3,2379.11 4694,2413.81 C4.2 ; J7.1 J7.2 J7.3 5849.99,4068.31 6094.28,3824.02 H2.3
  Top Layer w40: C6.2 3915.6,2478.91 3935,2498.31 4220,2498.31 4242.7,2475.61 C7.2 4242.7,2371.01 4220,2348.31 4120,2348.31 4105.4,2333.71 U3.1 ; C3.2 5280,2133.31 5286.7,2126.61 U6.1
  Top Layer w70.87: CN1.2 6240,1858.31 6327.8,1770.51 SW1.2@6327.8,1671.21
  Bottom Layer w20: v1(4789.99,4513.3) 4790,4458.31 4845,4403.31 4845,4308.31 4890,4263.31 5150,4263.31 5195.2,4218.11 J6.3 5195.2,4142.91 5226.3,4111.81 5534.5,4111.81 5591,4168.31 J7.1 ; v1(5559.99,4710.43) 5702.9,4710.41 5760,4653.31 5760,4568.31 5920,4408.31 5920,4183.31 5905,4168.31 J7.3
  other v1: 3145,3388.31 3188.07,4451.57 3243.19,4451.57 3188.07,4506.69 3243.19,4506.69
I34: J10.2 U5.6 | length 3122.6
  Top Layer w10: U5.6@2920.4,4531.61 2793.3,4531.61 2735,4473.31 2735,4128.31 2000,3393.31 2000,3118.31 2050,3068.31 2655,3068.31 3029.8,2693.51 J10.2
I35: J10.3 U5.7 | length 3124.3
  Top Layer w10: U5.7@2920.4,4481.61 2788.3,4481.61 2760,4453.31 2760,4118.31 2030,3388.31 2030,3138.31 2075,3093.31 2735,3093.31 3129.8,2698.51 J10.3
I36: H1.2 U5.4 | length 1607.4
  Top Layer w10: U5.4@2920.4,4631.61 v1(3005,4631.59)
  Bottom Layer w10: H1.2 2325,3753.31 2735,4163.31 2735,4618.31 2850,4733.31 2960,4733.31 3005,4688.31 v1(3005,4631.59)
I39: H2.2 U5.5 | length 4547.9
  Top Layer w10: U5.5@2920.4,4581.61 v1(3005,4581.59)
  Bottom Layer w10: v1(3005,4581.59) 3035,4611.61 3035,4738.31 3060,4763.31 3770,4763.31 3960,4953.31 5740,4953.31 5790,4903.31 5790,4578.31 5950,4418.31 5950,4008.31 6230,3728.31 6266.8,3728.31 H2.2
IO0: R5.1 U5.25 | length 1969.6
  Top Layer w10: R5.1 2220,3543.31 2525,3848.31 3520,3848.31 3555,3883.31 3555,4103.31 3583.3,4131.61 U5.25
IO0_BTN: C13.1 Q5.2 R5.2 SW5.1 SW5.2 | length 1496.7
  Top Layer w10: v1@2085,3283.31 v1(2085,3279.81) 2105,3259.81 C13.1 R5.2 2132,3321.31 2111.3,3342.01 SW5.1 ; Q5.2 2987.4,3490.71 3005,3508.31 v1(3005,3533.31)
  Bottom Layer w10: v1(2085,3279.81) 2641.5,3279.81 2700,3338.31 2700,3408.31 2775,3483.31 2825,3533.31 v1(3005,3533.31)
IO2: J12.1 U5.24 | length 189.9
  Top Layer w10: J12.1 3444.8,3953.11 3499.7,4008.01 U5.24
IO4: U5.26 U10.15 U10.23 | length 4356.9
  Top Layer w10: U5.26 4716.7,4181.61 5425,3473.31 5785,3473.31 5810,3448.31 5810,3003.31 5586,2779.31 5236,2779.31 5170,2713.31 5170,2483.31 5146.3,2459.61 5045.8,2459.61 5006.3,2459.61 4985,2438.31 4985,2273.31 5003.4,2254.91 U10.23@5045.8,2254.91
IO5: P2.1 U5.29 | length 715.8
  Top Layer w10: U5.29 3738.3,4331.61 3810,4403.31 3810,4598.31 3953,4741.31 P2.1
IO12: P2.7 U5.14 | length 1986.6
  Top Layer w10: U5.14@2920.4,4131.61 v1(3005,4131.59)
  Bottom Layer w10: v1(3005,4131.59) 3018.3,4131.61 3055,4168.31 3115,4168.31 3155,4208.31 3245,4208.31 3420,4383.31 3420,4583.31 3520,4683.31 3780,4683.31 3990,4893.31 4190,4893.31 4210,4873.31 4210,4813.31 4230,4793.31 4335,4793.31 4360.9,4767.41 P2.7
IO13: P2.6 U5.16 | length 1756.8
  Top Layer w10: U5.16 3100,4073.01 v1(3100,4198.3)
  Bottom Layer w10: v1(3100,4198.3) 3100,4213.31 3125,4238.31 3240,4238.31 3395,4393.31 3395,4588.31 3515,4708.31 3775,4708.31 3980,4913.31 4225,4913.31 4260.9,4877.41 P2.6
IO14: P2.8 U5.13 | length 1949.8
  Top Layer w10: U5.13@2920.4,4181.61 v1(3005,4181.59)
  Bottom Layer w10: v1(3005,4181.59) 3005,4218.31 3045,4258.31 3230,4258.31 3375,4403.31 3375,4603.31 3505,4733.31 3770,4733.31 3970,4933.31 4305,4933.31 4360.9,4877.41 P2.8
IO15: P2.5 U5.23 | length 1367.8
  Top Layer w10: U5.23 3450,4073.01 v1(3450,4298.3)
  Bottom Layer w10: v1(3450,4298.3) 3495,4343.31 3495,4393.31 3520,4418.31 3520,4513.31 3560,4553.31 3560,4633.31 3570,4643.31 3800,4643.31 3840,4683.31 4230,4683.31 4260.9,4714.21 P2.5
IO16: U5.27 U10.16 U10.17 | length 4237.9
  Top Layer w10: U5.27 3750,4231.61 3778.3,4203.31 4720,4203.31 5430,3493.31 5795,3493.31 5830,3458.31 5830,2998.31 5595,2763.31 5245,2763.31 5190,2708.31 5190,2473.31 5150.7,2434.01 5045.8,2434.01 5010.7,2434.01 5005,2428.31 5005,2413.31 5010,2408.31 U10.17@5045.8,2408.31
IO17: U5.28 U10.21 U10.22 | length 4428.4
  Top Layer w10: U5.28 3731.7,4281.61 3790,4223.31 4725,4223.31 5435,3513.31 5805,3513.31 5850,3468.31 5850,2993.31 5600,2743.31 5250,2743.31 5210,2703.31 5210,2343.31 5172.8,2306.11 5045.8,2306.11 5012.8,2306.11 5007.8,2301.11 5007.8,2285.51 5012.8,2280.51 U10.22@5045.8,2280.51
IO18: P2.4 U5.30 | length 855.3
  Top Layer w10: U5.30 3753.3,4381.61 3785,4413.31 3785,4623.31 3955,4793.31 4130,4793.31 4160.9,4824.21 P2.4
IO19: P2.3 U5.31 | length 1076.5
  Top Layer w10: v1(3495,4428.3) 3625.7,4428.31 U5.31
  Bottom Layer w10: v1(3495,4428.3) 3495,4523.31 3539.99,4568.31 3539.99,4648.31 3555,4663.31 3790,4663.31 3920,4793.31 4108.9,4793.31 P2.3
IO21: J6.2 R2.2 R20.2 U4.15 U5.33 | length 2621.3
  Top Layer w10: U5.33 3683.3,4531.61 v1(3735,4583.3) ; 4204.7,4417.31 4174,4417.31 4165,4408.31 v1(4165,4393.3) 4175,4393.31 4230,4338.31 4250,4338.31 4260,4328.31 R20.2 ; v1(4907.86,4338.3) R2.2 5074.9,4407.51 U4.15
  Bottom Layer w10: v1(3735,4583.3) 3810,4583.3 3979.99,4413.31 4069.99,4413.31 4119.99,4363.31 4144.99,4363.31 4164.99,4383.31 v1(4165,4393.3) 4695,4393.31 4750,4448.31 4750,4538.31 4770,4558.31 4810,4558.31 4830,4538.31 4830,4468.31 4907.9,4390.41 v1(4907.86,4338.3)
  Bottom Layer w20: v1(4907.86,4338.3) 4907.9,4320.71 4925.9,4302.71 5188.5,4302.71 5295.2,4196.01 J6.2
IO22: J6.1 R3.2 R21.2 U4.14 U5.36 U8.23 | length 2789
  Top Layer w10: U5.36 3691.7,4681.61 3735,4638.31 v1(3735,4618.3) ; U8.23 4139.8,4433.11 4130,4423.31 v1(4130,4393.3) 4185,4338.31 4200,4338.31 4210,4328.31 R21.2 ; v1@4982.5,4513.41 4925.1,4513.41 4907.9,4496.21 R3.2 5071.7,4466.51 U4.14
  Bottom Layer w10: v1(3735,4618.3) 3800,4618.31 3985,4433.31 4100,4433.31 v1@4130,4403.31 ; v1(4982.55,4513.38) 4884.9,4513.41 4820,4578.31 4760,4578.31 4730,4548.31 4730,4463.31 4685,4418.31 4145,4418.31 v1@4130,4403.31 ; v1@4130,4403.31 v1(4130,4393.3) v1@4130,4403.31
  Bottom Layer w20: v1(4982.55,4513.38) 5154.6,4513.41 5175,4493.01 5175,4418.61 5395.2,4198.41 J6.1
IO23: P2.2 R13.1 U5.37 | length 5696.3
  Top Layer w10: R13.1@2750,1775.31 v1(2750,1838.31) ; v1(3470,4733.3) 3627.3,4733.31 U5.37 3753.3,4731.61 3863,4841.31 P2.2
  Bottom Layer w10: v1(2750,1838.31) 2770,1838.31 2775,1833.31 2775,1713.31 2765,1703.31 2635,1703.31 2600,1668.31 2600,1628.31 2570,1598.31 2520,1598.31 2470,1648.31 2435,1648.31 2355,1728.31 2355,1753.31 2305,1803.31 2210,1803.31 2155,1858.31 2155,2853.31 2030,2978.31 2030,3273.31 2065,3308.31 2635,3308.31 2675,3348.31 2675,4033.31 2860,4218.31 2980,4218.31 3040,4278.31 3225,4278.31 3355,4408.31 3355,4608.31 3470,4723.31 v1(3470,4733.3)
IO25: U5.10 U9.16 U9.17 | length 2554.5
  Top Layer w10: U5.10@2920.4,4331.61 2873.3,4331.61 2820,4278.31 2820,4068.31 2887.1,4001.21 2960.1,4001.21 3010,3951.31 v1(3010,3883.3) ; v1(3400,2331.69) 3476,2331.71 3511,2331.71 3516.8,2326.01 3516.8,2311.01 3511.8,2306.01 U9.16@3476,2306.01
  Bottom Layer w10: v1(3010,3883.3) 3010,3693.31 3215,3488.31 3215,2833.31 3295,2753.31 3295,2393.31 3356.6,2331.71 v1(3400,2331.69)
IO26: U5.11 U9.21 U9.22 | length 2384.4
  Top Layer w10: U5.11@2920.4,4281.61 2873.3,4281.61 2840,4248.31 2840,4073.31 2894.8,4018.51 2968.4,4018.51 3045,3941.91 v1(3045,3883.31) ; v1@3400,2434.01 U9.21@3476,2434.01 ; U9.21@3476,2433.91 3511.8,2433.91 3516.8,2438.91 3516.8,2453.91 3511,2459.61 U9.22@3476,2459.61
  Bottom Layer w10: v1(3045,3883.31) 3045,3684.51 3235,3494.31 3235,2838.31 3315,2758.31 3315,2478.31 3359.2,2434.01 v1@3400,2434.01
  other v1: 3400,2434.06
IO27: U5.12 U9.15 U9.23 | length 2460.7
  Top Layer w10: U5.12@2920.4,4231.61 2873.3,4231.61 2860,4218.31 2860,4078.31 2903.7,4034.61 2978.7,4034.61 3080,3933.31 v1(3080,3883.3) ; v1(3400,2485.24) 3476,2485.21 3513.1,2485.21 3535,2463.31 3535,2303.31 3512.2,2280.51 U9.15@3476,2280.51
  Bottom Layer w10: v1(3080,3883.3) 3080,3673.31 3255,3498.31 3255,2843.31 3335,2763.31 3335,2513.31 3363.1,2485.21 v1(3400,2485.24)
IO32: J11.2 U5.8 | length 3890
  Top Layer w10: U5.8@2920.4,4431.61 3085,4431.61 3138.3,4378.31 3485,4378.31 3510,4353.31 v1(3525,4353.3)
  Bottom Layer w10: v1(3525,4353.3) 3750,4353.31 3900,4203.31 4720,4203.31 5585,3338.31 5585,2973.31 5395,2783.31 5395,2648.71 J11.2
IO33: J11.3 U5.9 | length 3982.2
  Top Layer w10: U5.9@2920.4,4381.61 3105,4381.61 3128.3,4358.31 3480,4358.31 3510,4328.31 3540,4328.31 3550,4338.31 3550,4378.31 3540,4388.31 v1(3525,4388.3)
  Bottom Layer w10: v1(3525,4388.3) 3540,4373.31 3755,4373.31 3905,4223.31 4725,4223.31 5435,3513.31 5605,3343.31 5605,2963.31 5492,2850.31 J11.3
J4_1: J4.1 U4.1 | length 259.7
  Top Layer w10: U4.1 5507.9,4360.41 5525,4343.31 5525,4303.31 5560,4268.31 J4.1
J4_2: J4.2 U4.2 | length 403.8
  Top Layer w10: U4.2 5537.9,4410.41 5560,4388.31 5560,4338.31 5580,4318.31 5730,4318.31 5750,4298.31 J4.2
J4_3: J4.3 U4.3 | length 563.8
  Top Layer w10: U4.3 v1(5559.99,4460.43)
  Bottom Layer w10: v1(5559.99,4460.43) 5560,4338.31 5580,4318.31 5825,4318.31 5850,4293.31 J4.3
LED1_2: LED1.2 R19.1 | length 448
  Top Layer w10: LED1.2 5361.3,4822.01 5385,4798.31 5555,4798.31 5655.9,4697.41 R19.1
LED2_2: LED2.2 R23.1 | length 479.3
  Top Layer w10: R23.1 4845.7,4712.61 4835,4723.31 4835,4753.31 4845,4763.31 5100,4763.31 5125.1,4788.41 LED2.2
LED3_2: LED3.2 R24.1 | length 315.8
  Top Layer w10: R24.1 4844.9,4663.41 4815,4693.31 4815,4768.31 4835,4788.31 4865,4788.31 4888.8,4812.11 LED3.2
LED4_1: LED4.1 R25.2 | length 684
  Top Layer w10: LED4.1 5581.8,4906.51 5575,4913.31 5575,4933.31 5585,4943.31 5685,4943.31 5740,4888.31 5740,4558.31 5689.6,4507.91 R25.2
LED4_3: LED4.3 R27.1 | length 317.6
  Top Layer w10: R27.1 5685.9,4614.21 5700,4628.31 5700,4858.31 5685.3,4873.01 LED4.3
LED4_4: LED4.4 R26.1 | length 418.2
  Top Layer w10: R26.1 5686.7,4565.01 5720,4598.31 5720,4873.31 5686.8,4906.51 LED4.4
NCS: R22.2 U8.22 | length 254
  Top Layer w10: R22.2 4160,4323.31 4105,4378.31 4105,4428.31 4125.5,4448.81 U8.22
NULL: J12.2@3344.76,3905.51
P0: R25.1 U4.4 | length 172.4
  Top Layer w10: U4.4 5451.9,4507.91 R25.1
P1: R26.2 U4.5 | length 171.8
  Top Layer w10: U4.5 5617.3,4560.41 R26.2
P2: R27.2 U4.6 | length 171.5
  Top Layer w10: U4.6 5618.1,4610.41 R27.2
P3: R19.2 U4.7 | length 171.2
  Top Layer w10: U4.7 5454.8,4663.41 R19.2
P4: R23.2 U4.9 | length 170.8
  Top Layer w10: R23.2 4987.7,4712.61 5075.7,4712.61 U4.9
P5: R24.2 U4.10 | length 171.2
  Top Layer w10: R24.2 5074.9,4663.41 U4.10
P6: R7.1 SW2.2 U4.11 | length 2140.5
  Top Layer w10: R7.1 5074.1,4614.21 U4.11
  Top Layer w20: U4.11 5222.9,4610.41 5275,4558.31 5275,4438.31 5411.3,4302.01 5451.3,4302.01 5542.8,4210.51 5542.8,4125.51 6304.1,3364.21 SW2.2
P7: R8.1 SW3.2 U4.12 | length 1930.3
  Top Layer w10: R8.1 5073.3,4565.01 U4.12
  Top Layer w20: U4.12 5206.4,4560.41 5239.2,4527.51 5239.2,4421.21 5396.3,4264.21 5438.5,4264.21 5501.8,4200.81 5501.8,4099.21 6025,3576.11 6025,3393.31 5995.9,3364.21 SW3.2
Q1_1: Q1.1 R1.1 SW1.1 | length 1575.6
  Top Layer w59.05: v2(5344.99,1643.31) R1.1 5495.6,1737.01 Q1.1
  Bottom Layer w59.05: v2(5344.99,1643.31) 5495,1643.31 5495,1848.31 5650,2003.31 5890,2003.31 6080,1813.31 6165,1813.31 6209.7,1768.61 SW1.1@6209.7,1671.21
Q1_2: CN1.1 Q1.2 R1.2 | length 286.6
  Top Layer w59.05: Q1.2 5574.4,1737.01 R1.2 5738.9,1643.31 CN1.1
Q2_1: C12.1 J3.2 Q2.1 Q3.1 R13.2 R15.1 | length 606
  Top Layer w10: Q3.1 2460.3,1578.01 2470,1568.31 2555,1568.31 2570,1583.31 2570,1708.31 2560,1718.31 2560,1743.31 2590,1743.31 2592,1741.31 R15.1 2657,1741.31 2661.5,1736.81 C12.1@2690,1736.81 ; J3.2 2680,1683.31 2690,1693.31 C12.1@2690,1736.81 ; R13.2 2723,1741.31 2718.5,1736.81 C12.1@2690,1736.81
Q4_1: Q4.1 R14.2 | length 97.5
  Top Layer w10: Q4.1 3002.4,3175.91 3007,3171.31 R14.2
Q5_1: Q5.1 R16.2 | length 90.4
  Top Layer w10: R16.2 2913,3401.31 2927.6,3415.91 Q5.1
RTS: Q4.2 R16.1 U7.24 | length 235.5
  Top Layer w10: Q4.2 2954.4,3303.91 2947,3311.31 R16.1 2955,3358.31 3005.3,3408.01 U7.24
RXD: R17.2 U7.25 | length 464.5
  Top Layer w10: v1(2760,3363.31) 2828,3363.31 R17.2 ; v1(2985,3298.31) 2985,3363.31 3010,3388.31 U7.25
  Bottom Layer w10: v1(2760,3363.31) 2825,3363.31 2890,3298.31 v1(2985,3298.31)
RXD0: R18.1 U5.34 | length 1977.7
  Top Layer w10: R18.1 2762.9,3305.31 2735,3333.31 2735,3388.31 2760,3413.31 2785,3413.31 2805,3433.31 2805,3563.31 2840,3598.31 2880,3598.31 2895,3583.31 v1(2895,3573.31) ; v1(3510,4578.3) 3625.7,4578.31 U5.34
  Bottom Layer w10: v1(2895,3573.31) 2895,3923.31 3075,4103.31 3115,4103.31 3180,4168.31 3280,4168.31 3470,4358.31 3470,4563.31 3485,4578.31 v1(3510,4578.3)
S$11580: 
S$13504: 
S$13508: 
S$13516: 
S$13520: 
S$13524: 
S$13528: 
S$13532: 
S$13536: 
S$13540: 
S$13544: 
S$279781: 
S$279785: 
S$279789: 
S$279920: 
S$279924: 
S$279931: 
S$279935: 
S$279942: 
S$280190: 
S$280194: 
TXD: R18.2 U7.26 | length 462.7
  Top Layer w10: v1(2760,3273.31) 2828,3273.31 R18.2 ; v1(3015,3278.31) 3015,3308.31 3005,3318.31 3005,3358.31 3015.3,3368.61 U7.26
  Bottom Layer w10: v1(2760,3273.31) 3010,3273.31 v1(3015,3278.31)
TXD0: R17.1 U5.35 | length 1719
  Top Layer w10: R17.1 2830,3543.31 v1(2860,3573.31) ; v1(3510,4628.3) 3510,4631.61 U5.35
  Bottom Layer w10: v1(2860,3573.31) 2860,3918.31 3065,4123.31 3105,4123.31 3170,4188.31 3265,4188.31 3445,4368.31 3445,4568.31 3505,4628.31 v1(3510,4628.3)
U6_2: R4.2 U6.2 | length 113.1
  Top Layer w40: R4.2@5219.7,2033.31 5323.3,2033.31 U6.2
U7_8: R9.2 R11.1 U7.8 | length 145.7
  Top Layer w10: U7.8@3238.6,3329.21 3266,3329.21 3298,3361.31 R9.2 R11.1
U7_9: R6.2 U7.9 | length 194
  Top Layer w10: U7.9 3260.6,3348.91 3290,3378.31 3290,3423.31 3300,3433.31 3315,3433.31 3335,3453.31 R6.2
U7_11: R12.1 U7.11 | length 193.4
  Top Layer w10: U7.11 3260,3388.31 3270,3398.31 3270,3508.31 3277,3515.31 R12.1
U8_9: R29.1 U8.9 | length 187.7
  Top Layer w10: U8.9 4344.5,4448.81 4360,4433.31 4360,4378.31 4335,4353.31 R29.1
U8_10: C17.1 U8.10 | length 208.5
  Top Layer w10: U8.10@4317.1,4464.51 4353.8,4464.51 4377.4,4440.91 4377.4,4363.01 4395,4345.41 C17.1
U8_11: R28.1 U8.11 | length 271.1
  Top Layer w10: U8.11 4363,4480.31 4395.2,4448.11 4395.2,4372.51 4419.3,4348.31 4440,4348.31 4455,4333.31 R28.1
USB_DN: D2.1 J1.2 Q3.3 U7.5 | length 2802.8
  Top Layer w10: J1.2 2168.4,1741.71 2223.5,1796.81 2223.5,1809.01 2223.5,1846.81 v1(2250,1873.31) ; Q3.3 v1(2480,1738.31) ; U7.5 3164.7,3248.61 3180,3233.31 v1(3180,3223.31)
  Bottom Layer w10: v1(2480,1738.31) 2450,1738.31 2420,1768.31 2420,1823.31 2370,1873.31 v1(2250,1873.31) 2220.7,1902.61 2220.7,2850.81 2463.7,3093.71 3094.8,3093.71 3180,3178.91 v1(3180,3223.31)
USB_DP: D3.1 J1.3 Q2.3 U7.4 | length 2986
  Top Layer w10: J1.3 2194,1742.31 2220,1768.31 2305,1768.31 2331.8,1795.11 2331.8,1809.01 2370,1809.01 2385,1794.01 v1(2385,1768.31) ; v1(2540.27,1643.31) Q2.3 ; v1(3125,3223.31) 3125,3233.31 3145,3253.31 U7.4
  Bottom Layer w10: v1(2540.27,1643.31) 2520,1643.31 2480,1683.31 2445,1683.31 2385,1743.31 v1(2385,1768.31) 2320,1833.31 2215,1833.31 2185,1863.31 2185,2853.31 2451.8,3120.11 3066,3120.11 3125,3179.01 v1(3125,3223.31)
VCC: C3.1 pad.1 Q1.3 R4.1 U2.3 U9.13 U9.14 U9.24 U10.13 U10.14 U10.24 | length 5474.7
  Top Layer w10: U9.13@3476,2229.21 3511.8,2229.21 3516.8,2234.21 3516.8,2249.21 3511,2254.91 ; U9.14@3476,2254.91 3511,2254.91 ; U9.24@3476,2510.81 3512.5,2510.81 3555,2468.31 3555,2293.31 3516.6,2254.91 3511,2254.91 ; U10.24@5045.8,2229.31 4999,2229.31 4965,2263.31 4965,2448.31 5001.8,2485.11 5010,2485.11 ; U10.14@5045.8,2485.11 5010,2485.11 ; U10.13@5045.8,2510.81 5010.8,2510.81 5005,2505.11 5005,2490.11 5010,2485.11
  Top Layer w40: C3.1 5150.6,2082.71 5160.3,2073.01 R4.1
  Top Layer w60: 3516.75,2234.22 3516.75,2001.56 3569.99,1948.31 4320,1948.31 ; U2.3 4416.4,2361.91 4405,2373.31 4335,2373.31 4320,2358.31 4320,1948.31 ; 5005,2505.11 4951.8,2505.11 4911.8,2465.11 4911.8,2181.51 4960,2133.31 ; 5005.05,2505.13 5005.05,2638.37 5499.48,3132.8 pad.1 ; C3.1 4960,2133.31 ; R4.1 5160.3,1953.01 5295.6,1817.71 Q1.3 ; 4320,1948.31 4775,1948.31 4960,2133.31
pads on no net: J1.4 SW1.3 SW1.4 SW1.5 SW2.1 SW2.3 SW3.1 SW3.3 U1. U4.13 U5.17 U5.18 U5.19 U5.20 U5.21 U5.22 U5.32 U7.1 U7.2 U7.10 U7.12 U7.13 U7.14 U7.15 U7.16 U7.17 U7.18 U7.19 U7.20 U7.21 U7.22 U7.23 U7.27 U8.2 U8.3 U8.4 U8.5 U8.14 U8.15 U8.16 U8.17 U8.21 U8.25 U21. U22. U23. U24. U25. U26. U27. U28. U29.

## Polygon pours and split planes (outlines as drawn)
GND on Bottom Layer (solid): 1704.62,1537.01 1703.83,1537.4 1503.83,1737.4 1503.83,3119.29 1504.22,3120.08 2291.62,3907.47 2291.62,4891.73 2491.22,5091.33 2650.28,5091.33 2919.18,4822.44 2918.78,4823.22 3637.68,4823.22 3639.25,4824.8 3895.16,5091.73 6039.64,5091.73 6240.43,4890.94 6240.43,3908.26 6240.03,3907.48 7027.04,3120.47 7027.04,1739.76 7026.25,1738.97 7026.25,1737.01 6826.25,1537.01 1704.62,1537.01
GND on Top Layer (solid): 1704.41,1537.21 1703.62,1537.6 1503.62,1737.6 1503.62,3119.49 1504.02,3120.28 2291.42,3907.68 2291.42,4891.93 2491.02,5091.53 2650.08,5091.53 2918.97,4822.64 2918.58,4823.42 3637.48,4823.42 3639.05,4825 3894.96,5091.93 6039.44,5091.93 6240.23,4891.14 6240.23,3908.47 6239.83,3907.68 7026.84,3120.67 7026.84,1739.97 7026.05,1739.18 7026.05,1737.21 6826.05,1537.21 1704.41,1537.21

## Keep-outs
Keep-Out Layer:
  circle w10 net S$11580: c4260.9,3314.96 r688.98

## Silkscreen, mask and mechanical layers (free items; w line width, h text height)
Top Overlay:
  lines w10: 5399.48,3114.18 5799.48,3114.18 ; 5399.48,3353.13 5799.48,3353.13 ; 5436.28,3114.19 5444.48,3114.19 5444.48,3190.59 5464.48,3210.59 5534.48,3210.59 5554.48,3190.59 5554.48,3114.19 ; 5636.28,3114.19 5644.48,3114.19 5644.48,3190.59 5664.48,3210.59 5734.48,3210.59 5754.48,3190.59 5754.48,3114.19
  lines w10 net S$280190: 5399.48,3114.18 5399.48,3353.13
  lines w10 net S$280194: 5799.48,3114.18 5799.48,3353.13
  text "Reset" at 2376.65,3381.89 h59.05
  text "+" at 5437.34,3155.85 h80 r225
  text "-" at 5707.2,3126.38 h80 r90
  text "IN+5V" at 5172.71,3049.61 h59.05 r90
  text "OFF" at 6620.34,1608.67 h59.05
  text "ON" at 5929.79,1608.27 h59.05
Document:
  region: 5559.48,3110.59 5559.48,3190.59 5534.48,3215.59 5464.48,3215.59 5439.48,3190.59 5439.48,3110.59 5449.48,3110.59 5449.48,3185.59 5469.48,3205.59 5529.48,3205.59 5549.48,3185.59 5549.48,3110.59
  region: 5759.48,3110.59 5759.48,3190.59 5734.48,3215.59 5664.48,3215.59 5639.48,3190.59 5639.48,3110.59 5649.48,3110.59 5649.48,3185.59 5669.48,3205.59 5729.48,3205.59 5749.48,3185.59 5749.48,3110.59

## Text inside footprints (layer, text, board x,y; h text height)
LED4: Top Overlay "+" at 5572.95,4869.42 h31.5 r135
P3: Top Overlay "AO2" at 2684.53,2174.02 h59.05; Top Overlay "AO1" at 2684.13,2370.48 h59.05
P4: Top Overlay "BO2" at 5709.72,2369.29 h59.05; Top Overlay "BO1" at 5708.93,2167.33 h59.05